# Altium PCB opo_v3.0.PcbDoc (part 1 of 2)
Units mil, origin at the board's own origin, x right, y up, seen from the top; angles counter-clockwise.
Board outline 2047.24 x 1889.76 mil, 2 copper layers (Top Layer, Bottom Layer), stack 61.4 mil thick; 103 components, 79 nets, 432 pads, 140 vias.
Unrouted connection lines stored in the file: 108.
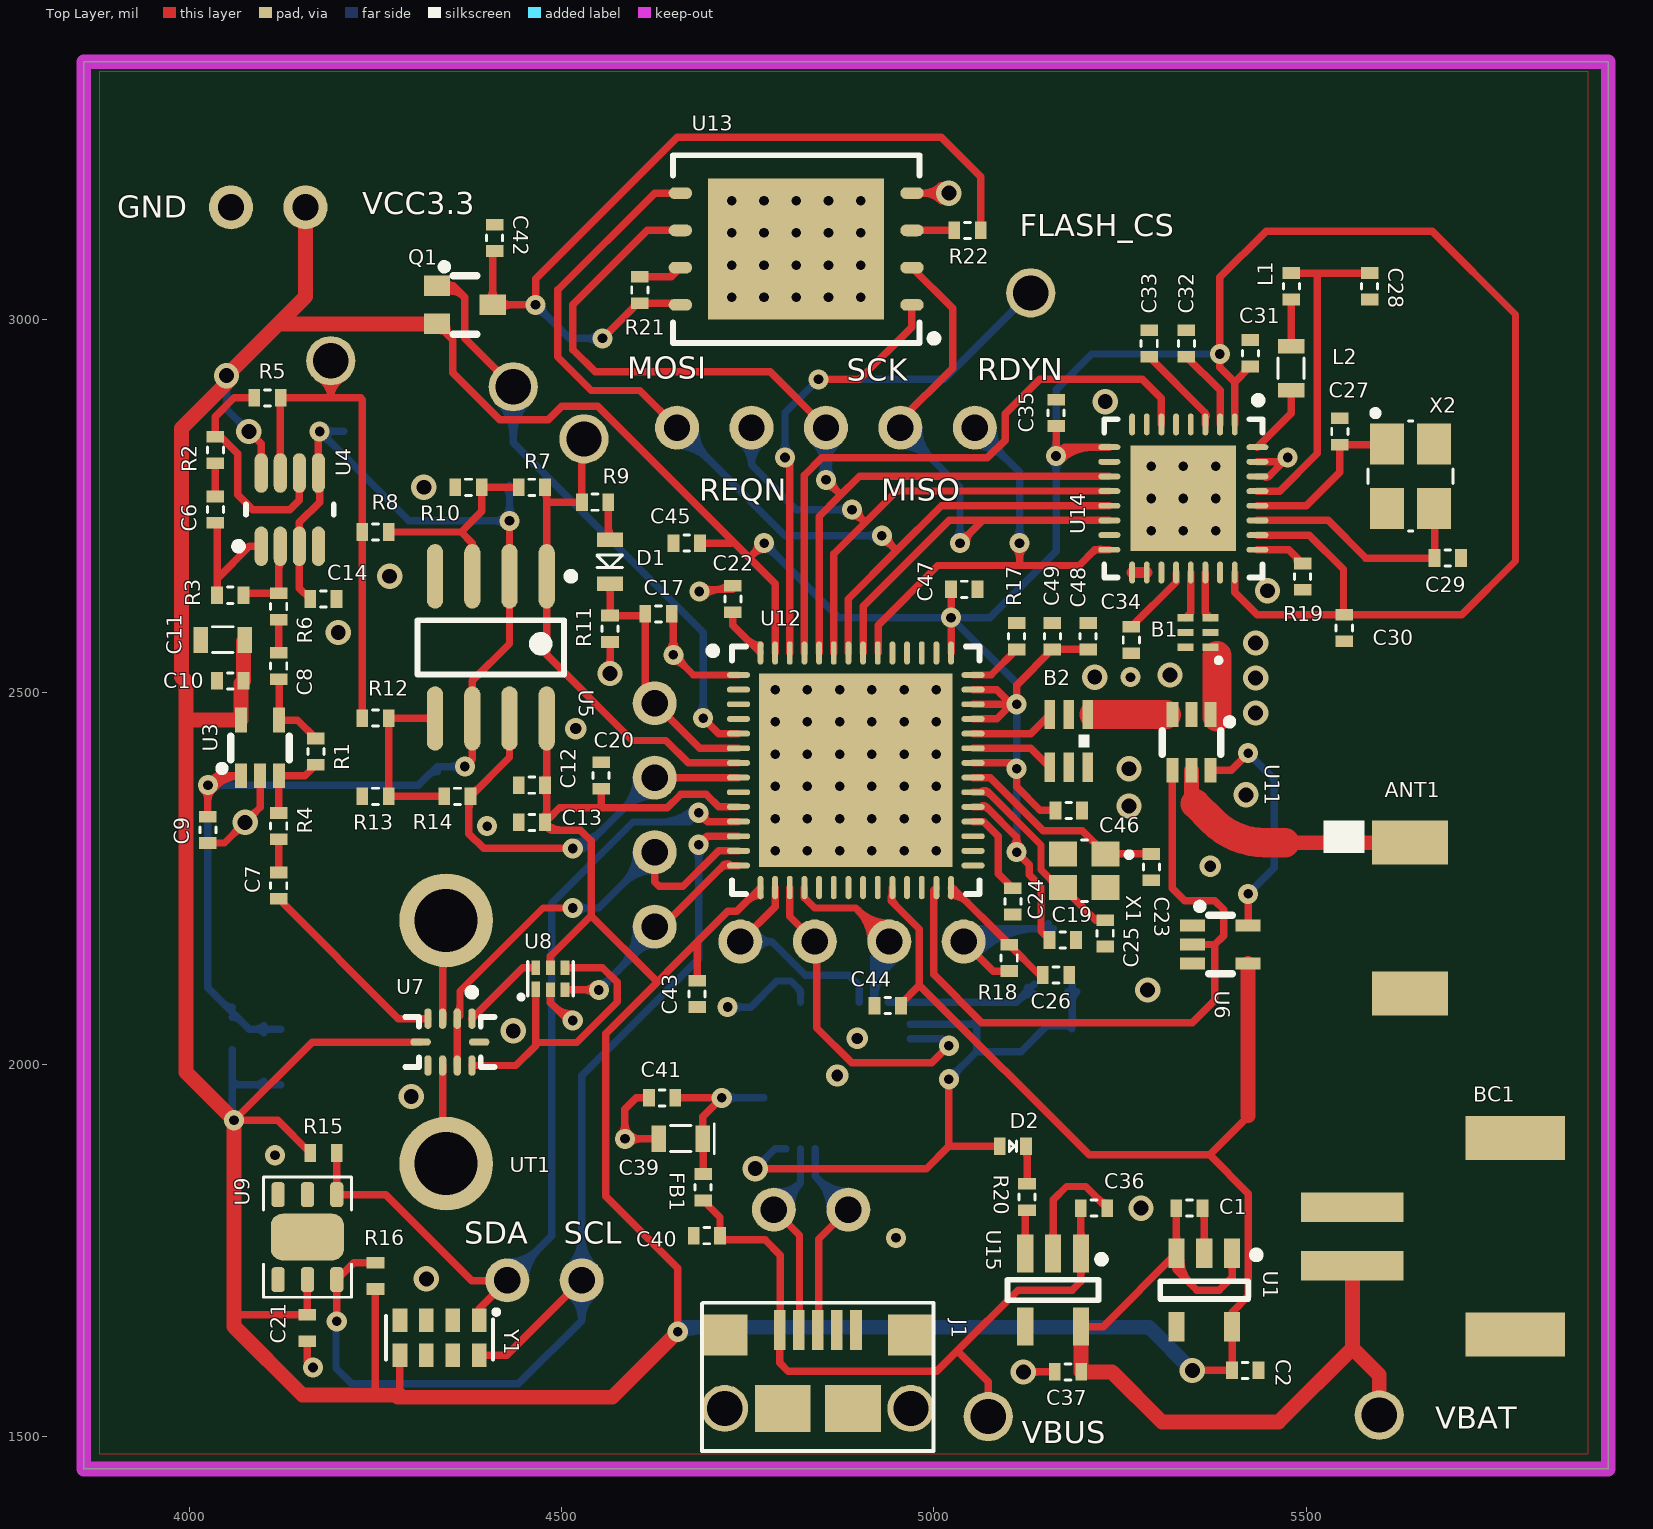
[diagram p0: Top Layer view]
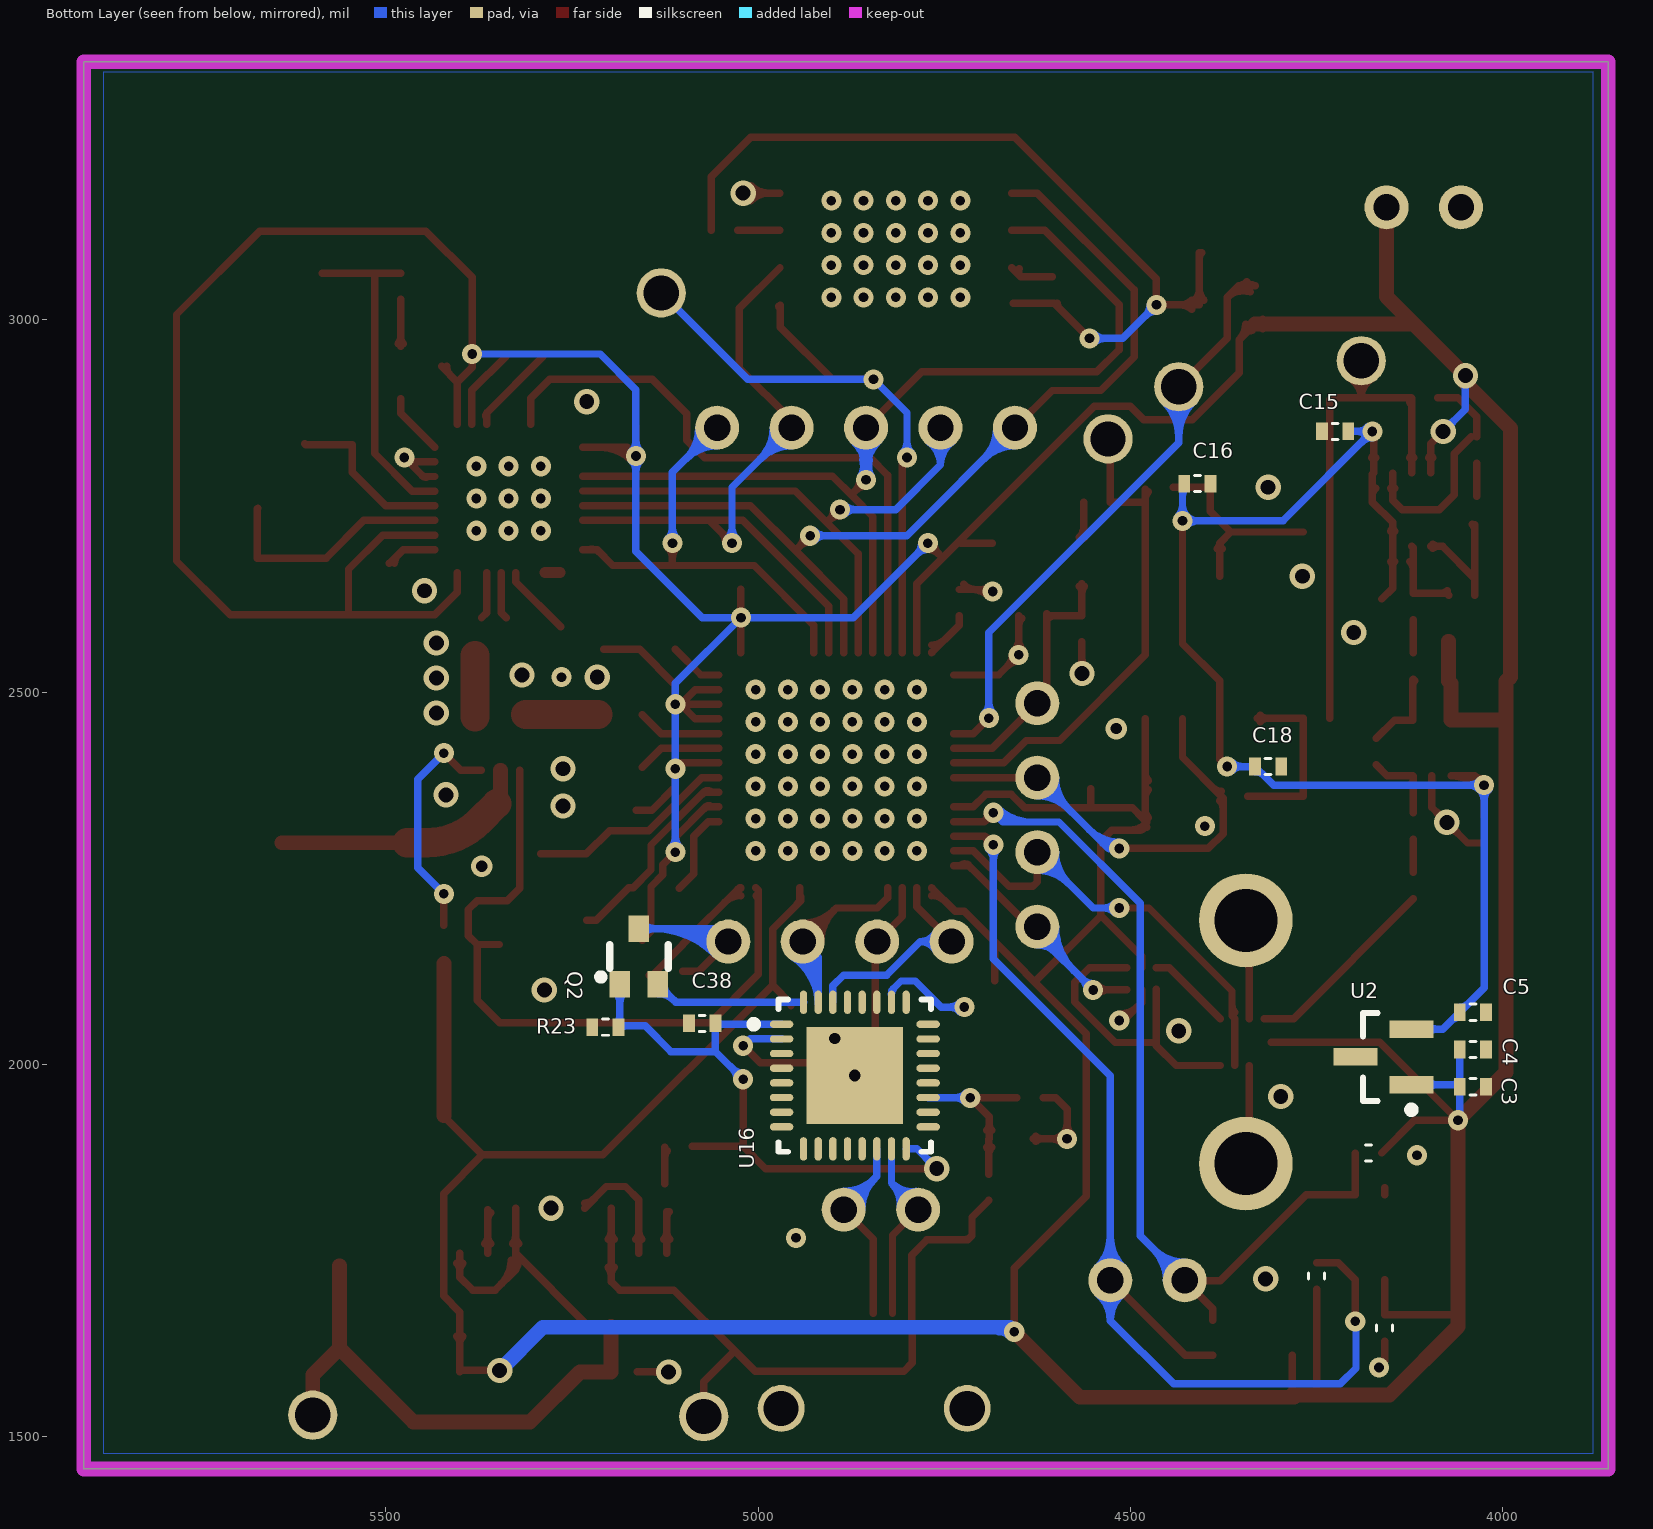
[diagram p1: Bottom Layer view, seen from below]

## Layer stack, top to bottom
Top Solder: solder mask 0.4, Solder Resist, Dk 3.5
Top Layer: signal copper 1.7
Dielectric 1: dielectric 58, FR-4, Dk 4.5
Bottom Layer: signal copper 1.7
Bottom Solder: solder mask 0.4, Solder Resist, Dk 3.5

## Board outline
3858.27,1456.69 3858.27,3346.46 5905.51,3346.46 5905.51,1456.69

## Design rules (kind name [scope] priority, off if disabled: settings)
Clearance "Clearance~Sunstone Circuits" [All] p1: gap=6 // Sunstone Circuits Minimum Clearance Rule (Double Sided)
HoleSize [All] p1: absolutevalues=TRUE maxlimit=100 minlimit=1.3 maxpercent=80.000 minpercent=20.000
HoleSize "HoleSize~Sunstone Circuits" [All] p2 off: absolutevalues=TRUE maxlimit=251 minlimit=16 maxpercent=80.000 minpercent=20.000 // SSC Hole Size Rule For Single Sided & Double Sided Designs.
HoleSize Testpoint [All] p3: absolutevalues=TRUE maxlimit=100 minlimit=1 maxpercent=80.000 minpercent=20.000
HoleSize TestPointUsage [All] p4: absolutevalues=TRUE maxlimit=100 minlimit=1 maxpercent=80.000 minpercent=20.000
MinimumAnnularRing "MinimumAnnularRing~Sunstone Circuits" [All] p1: minimumring=7 // Sunstone Circuits Minimum Annular Ring (Double Sided)
PlaneClearance "PlaneClearance~Sunstone Circuits" [All] p1: clearance=12 // Sunstone Circuits Power Plane Clearance Rule (Double Sided)
PlaneConnect "PlaneConnect~Sunstone Circuits" [All] p1: planeconnectstyle=Relief reliefexpansion=10 reliefentries=4 reliefconductorwidth=8 reliefairgap=10 // Sunstone Circuits Power Plane Connect Rule (Double Sided)
PolygonConnect "PolygonConnect~Sunstone Circuits" [All] p1: connectstyle=Direct reliefconductorwidth=8 reliefentries=4 polygonreliefangle="90 Angle" airgapwidth=10 // Sunstone Circuits Polygon Connect Style (Double Sided)
RoutingVias "RoutingVias~Sunstone Circuits" [All] p1: holewidth=16 width=30 viastyle="Through Hole" minholewidth=16 minwidth=30 maxholewidth=20 maxwidth=40 // Sunstone Circuits Routing Vias Rule (Double Sided)
ShortCircuit "ShortCircuit~Sunstone Circuits" [All] p1: allowed=FALSE // Sunstone Circuits Short Circuit Rule~Do Not Allow (Double Sided)
SolderMaskExpansion "SolderMaskExpansion~Sunstone Circuits" [All] p1: expansion=3 // Sunstone Circuits Solder Mask Expansion Rule (Double Sided)
UnpouredPolygon [All] p1: allowunpoured=FALSE
ViasUnderSMD "ViasUnderSMD~Sunstone Circuits" [All] p1: allowed=FALSE // Sunstone Circuits Vias Under SMD~Do Not Allow (Double Sided)
Width "Width~Sunstone Circuits" [All] p1: maxlimit=100 minlimit=6 preferedwidth=10 // Sunstone Circuits Minimum Width Rule (Double Sided)
25 further rules are at their usual default settings.

## Classes and differential pairs
component class accero_humid_rtc: C21 R15 R16 U9 Y1
component class bluetooth: B1 C27 C28 C29 C30 C31 C32 C33 C34 C35 L1 L2 R19 U14 X2
component class mcu: ANT1 B2 C19 C20 C22 C23 C24 C25 C26 C42 C43 C44 C45 C46 C47 C48 C49 Q1 Q2 R17 R18 R21 R22 R23 U6 U11 U12 U13 X1
component class power: BC1 C1 C2 C3 C4 C5 U1 U2
component class programming: C36 C37 C38 C39 C40 C41 D2 FB1 J1 R20 U15 U16
component class ultrasonic_rx: C6 C7 C8 C9 C10 C11 C12 C13 C14 C15 C16 C17 C18 D1 R1 R2 R3 R4 R5 R6 R7 R8 R9 R10 R11 R12 R13 R14 U3 U4 U5
component class ultrasonic_tx: U7 U8 UT1

## Components (designator, comment, footprint, x,y, rotation, side; value= is the part's Value field where it differs from the comment)
ANT1 "Ground Antenna" "Chip Antenna" 5644.37,2216 r270 top
B1 "2450BM14A0002" 2450BM14A0002 5354.69,2580 r270 top
B2 "BALUN" "Chip Balun" 5181,2434.37 r0 top
BC1 "PRT-08612" "JST PH 2PIN" 5562,1769 r90 top
C1 "Ceramic capacitor" 0402#1 5343,1807 r0 top
C2 "Ceramic capacitor" 0402#1 5418,1589 r0 top
C3 "Ceramic capacitor" 0402#1 4040,1970 r180 bottom
C4 "Ceramic capacitor" 0402#1 4040,2020 r180 bottom
C5 "Ceramic capacitor" 0402#1 4040,2070 r180 bottom
C6 "Ceramic capacitor" 0402#1 4035,2745 r90 top
C7 "Ceramic capacitor" 0402#1 4120,2240 r90 top
C8 "Ceramic capacitor" 0402#1 4120,2535 r90 top
C9 "Ceramic capacitor" 0402#1 4025,2315 r270 top
C10 "Ceramic capacitor" 0402#1 4055,2515 r180 top
C11 "Ceramic capacitor" 0603 4045,2570 r180 top
C12 "Ceramic capacitor" 0402#1 4460,2375 r180 top
C13 "Ceramic capacitor" 0402#1 4460,2325 r180 top
C14 "Ceramic capacitor" 0402#1 4180,2625 r0 top
C15 "Ceramic capacitor" 0402#1 4225,2850 r0 bottom
C16 "Ceramic capacitor" 0402#1 4410,2780 r180 bottom
C17 "Ceramic capacitor" 0402#1 4630,2605 r0 top
C18 "Ceramic capacitor" 0402#1 4315,2400 r180 bottom
C19 "Ceramic capacitor" 0402#1 5173,2167 r0 top
C20 "Ceramic capacitor" 0402#1 4553,2388 r90 top
C21 "Ceramic capacitor" 0402#2 4158.63,1646 r90 top
C22 "Ceramic capacitor" 0402#1 4730,2625 r90 top
C23 "13pf 0402 Cap" 0402#1 5292,2264.92 r270 top
C24 "Ceramic capacitor" 0402#1 5106,2219 r270 top
C25 "13pf 0402 Cap" 0402#1 5230,2176 r90 top
C26 "Ceramic capacitor" 0402#1 5164,2120 r0 top
C27 "15pF 0402 ceramic cap" 0402#1 5545,2850 r90 top
C28 "Ceramic capacitor" 0402#1 5585,3045 r270 top
C29 "15pF 0402 ceramic cap" 0402#1 5690,2680 r180 top
C30 "Ceramic capacitor" 0402#1 5551,2586 r270 top
C31 "4.7uF" 0402#1 5425,2955 r90 top
C32 "Ceramic capacitor" 0402#1 5339,2968 r90 top
C33 "33nF" 0402#1 5289,2968 r90 top
C34 "2.2nF" 0402#1 5265,2570 r270 top
C35 "Ceramic capacitor" 0402#1 5164,2875 r90 top
C36 "Ceramic capacitor" 0402#1 5215,1807 r0 top
C37 "Ceramic capacitor" 0402#1 5180,1587 r180 top
C38 "Ceramic capacitor" 0402#1 5075,2055 r0 bottom
C39 "Tantalum capacitor" "0603 - Polar Marking" 4660,1900 r180 top
C40 "Ceramic capacitor" 0402#1 4695,1770 r180 top
C41 "Ceramic capacitor" 0402#1 4635,1955 r180 top
C42 "Ceramic capacitor" 0402#1 4410,3110 r270 top
C43 "Ceramic capacitor" 0402#1 4682,2094.72 r270 top
C44 "Ceramic capacitor" 0402#1 4938,2079 r180 top
C45 "Ceramic capacitor" 0402#1 4668,2700 r180 top
C46 "Ceramic capacitor" 0402#1 5181,2341 r0 top
C47 "Ceramic capacitor" 0402#1 5040.67,2638 r0 top
C48 "Ceramic capacitor" 0402#1 5207,2575 r90 top
C49 "220pF 0402 ceramic cap" 0402#1 5159,2575 r90 top
D1 "Schottky diode" "0603 - DIODE" 4565,2675 r270 top
D2 "LED, Green" "0402 - DIODE" 5106,1890 r0 top
FB1 "Ferrite Bead" 0402#1 4690,1835 r270 top
J1 "micro USB-B" "Micro USB-B" 4844,1538 r0 top
L1 "15nH chip inductor" 0402#1 5480,3045 r270 top
L2 "10uH chip inductor" 0603 5480,2935 r270 top
Q1 "DMG1013UW" SC70-3 4370,3020 r270 top
Q2 "Si1300BDL" SC70-3 5160,2145 r180 bottom
R1 "Chip resistor" 0402#1 4170,2420 r90 top
R2 "Chip resistor" 0402#1 4035,2825 r90 top
R3 "Chip resistor" 0402#1 4055,2630 r0 top
R4 "Chip resistor" 0402#1 4120,2320 r90 top
R5 "Chip resistor" 0402#1 4105,2895 r180 top
R6 "Chip resistor" 0402#1 4120,2615 r90 top
R7 "Chip resistor" 0402#1 4460,2775 r0 top
R8 "Chip resistor" 0402#1 4250,2715 r0 top
R9 "Chip resistor" 0402#1 4545,2755 r0 top
R10 "Chip resistor" 0402#1 4375,2775 r180 top
R11 "Chip resistor" 0402#1 4565,2585 r270 top
R12 "Chip resistor" 0402#1 4250,2465 r0 top
R13 "Chip resistor" 0402#1 4250,2360 r180 top
R14 "Chip resistor" 0402#1 4360,2360 r0 top
R15 "Chip resistor" 0402#2 4180.28,1881 r180 top
R16 "Chip resistor" 0402#2 4250,1716 r270 top
R17 "56k 0402 Res" 0402#1 5111,2575 r90 top
R18 "2.2 Ohm 0402 Res" 0402#1 5101,2143 r270 top
R19 "22k 0402 resistor" 0402#1 5495,2655 r270 top
R20 "Chip resistor" 0402#1 5125,1822 r270 top
R21 "Chip resistor" 0402#1 4605,3040 r90 top
R22 "Chip resistor" 0402#1 5045,3120 r180 top
R23 "Chip resistor" 0402#1 5205,2050 r0 bottom
U1 "ADP162" TSOT23-5 5363,1697 r270 top
U2 "ISL60002" SOT23-3N 4160,2010 r0 bottom
U3 "MIC861" SC70-5 4095,2425 r0 top
U4 "MIC863" TSOP65P280X145-8N 4135,2745 r90 top
U5 "TS882" SO8 4405,2560 r270 top
U6 "NC7S14P5X" SC70-5 5384.6,2161 r270 top
U7 "NX3L4684" QFN50P155X200X13-10N 4350,2030 r270 top
U8 "NLX2G14" ULLGA6 4485,2115 r0 top
U9 "Si7021" DFN6-Si7021 4158.63,1768 r270 top
U11 "MASWSS0115" SC70-6 5345.83,2432.4 r180 top
U12 "cc2538" QFN50P800X800X100_HS-57N 4895,2395 r0 top
U13 "SST25VF064C" WSON 4815,3095 r180 top
U14 "nrf8001" QFN50P500X500X90_HS-33N 5335,2760 r270 top
U15 "MAX1555" SOT23-5 5160,1697 r270 top
U16 "FT232RQ" QFN-32 4870,1985 r180 bottom
UT1 "400EP250" "Transducer recepticle" 4345,2030 r90 top
X1 "32 MHz Crystal" FA-128 5202,2260 r180 top
X2 "16MHz Crystal" TSX-3225 5640,2790 r270 top
Y1 "RV-4162-C7" RV4162 4336,1633 r180 top

## Footprints (in the part's own frame and the unit in brackets; to place one, negate y for a bottom-side part, rotate by r counter-clockwise, add the part's x,y. Pads: shape width x height; smd on the part's side, far side on the other; paste and mask are expansions set on the pad)
0402#1 [mm] "2-Leads, Body 1.00x0.50mm, IPC Medium Density"
  rect 0.4x0.6 smd: 1(-0.45,0) 2(0.45,0)
  silkscreen extent -0.1,-0.28 0.1,0.28, body extent -0.53,-0.28 0.53,0.27, height 0.4
0402#2 [mm] "2-Leads, Body 1.00x0.50mm, IPC Medium Density"
  rect 0.4x0.6 smd: 1(0.45,0) 2(-0.45,0)
  body extent -0.53,-0.28 0.53,0.27, height 0.4
"0402 - DIODE" [mm] "2-Leads, Body 1.00x0.50mm, IPC Medium Density"
  rect 0.4x0.6 smd: 1(-0.45,0) 2(0.45,0)
  silkscreen extent -0.13,-0.18 0.13,0.18, body extent -0.53,-0.28 0.53,0.27, height 0.4
0603 [mm] "2-Leads, Body 1.55x0.85mm, IPC Medium Density"
  rect 0.5x0.9 smd: 1(-0.75,0) 2(0.75,0)
  silkscreen extent -0.35,-0.45 0.35,0.43, body extent -0.75,-0.42 0.75,0.43, height 0.5
"0603 - DIODE" [mm] "2-Leads, Body 1.55x0.85mm, IPC Medium Density"
  rect 0.5x0.9 smd: 1(-0.75,0) 2(0.75,0)
  silkscreen extent -0.23,-0.45 0.2,0.43, body extent -0.75,-0.42 0.75,0.43, height 0.5
"0603 - Polar Marking" [mm] "2-Leads, Body 1.55x0.85mm, IPC Medium Density"
  rect 0.5x0.9 smd: 1(-0.75,0) 2(0.75,0)
  silkscreen extent -1.14,-0.51 0.35,0.51, body extent -0.75,-0.42 0.75,0.43, height 0.5
2450BM14A0002 [mm]
  rect 0.25x0.55 smd: 1(0.5,0.425) 2(0,0.425) 3(-0.5,0.425) 4(-0.5,-0.425) 5(0,-0.425) 6(0.5,-0.425)
  silkscreen extent 0.91,0.66 0.99,0.74
"Chip Antenna" [mm] "FR05-S1-N-0-102"
  rect 1.5x2.6 smd: 1(-2.075,-0.125) ""(3.075,-0.125)
  silkscreen extent -2.82,-3.07 -1.72,-1.67, body extent -3.03,-1.63 3.98,1.38, height 2
"Chip Balun" [mm] "Chip Balun 2.4 GHz"
  rect 0.35x1 smd: 1(0.65,0.9) 2(0,0.9) 3(-0.65,0.9) 4(-0.65,-0.9) 5(0,-0.9) 6(0.65,-0.9)
  silkscreen extent 0.33,-0.23 0.7,0.23, body extent -1,-0.63 1,0.63, height 0.7
DFN6-Si7021 [mm]
  rrect50% 0.85x0.45 smd: 1(-1.45,1) 2(-1.45,0) 3(-1.45,-1) 4(1.45,-1) 5(1.45,0) 6(1.45,1)
  rrect50% 1.6x2.5 smd: 7(0,0)
  silkscreen extent -2.05,-1.5 2.05,1.5, body extent -1.5,-1.5 1.5,1.5, height 1.21
FA-128 [mm]
  rect 0.95x0.85 smd: 1(-0.725,-0.575) 2(0.725,-0.575) 3(0.725,0.575) 4(-0.725,0.575)
  silkscreen extent -1.58,-1.05 0.1,1.05
"JST PH 2PIN" [mm]
  rect 1x3.5 smd: 1(-1,0) 2(1,0)
  rect 1.5x3.4 smd: 3(-3.35,-5.55) 4(3.35,-5.55)
"Micro USB-B" [mm]
  rect 0.4x1.35 smd mask+0.1: 1(-1.3,2.675) 2(-0.65,2.675) 3(0,2.675) 4(0.65,2.675) 5(1.3,2.675)
  rect 1.6x1.4 smd mask+0.1: 6(-3.2,2.5) 6(3.2,2.5)
  round 1.6 hole 1.2: 6(-3.175,0) 6(3.175,0)
  rect 1.9x1.6 smd mask+0.1: 6(-1.2,0) 6(1.2,0)
  silkscreen extent -3.95,-1.45 3.95,3.6
QFN50P155X200X13-10N [mm] "QFN, 10-Leads, Body 2.1x1.6mm (max), Pitch 0.50mm, IPC Medium Density"
  oval 0.7x0.25 smd: 1(-0.8,0.75) 2(-0.8,0.25) 3(-0.8,-0.25) 4(-0.8,-0.75) 6(0.8,-0.75) 7(0.8,-0.25) 8(0.8,0.25) 9(0.8,0.75)
  oval 0.25x0.7 smd: 5(0,-1) 10(0,1)
  silkscreen extent -1.82,-1.53 0.85,1.53, body extent -0.83,-1.05 0.82,1.05, height 0.13
QFN50P500X500X90_HS-33N [mm] "QFN, 32-Leads, Body 5.00x5.00mm, Pitch 0.50mm, Thermal Pad 3.60x3.60mm, IPC Medium Density"
  oval 0.75x0.2 smd: 1(-2.525,1.75) 2(-2.525,1.25) 3(-2.525,0.75) 4(-2.525,0.25) 5(-2.525,-0.25) 6(-2.525,-0.75) 7(-2.525,-1.25) 8(-2.525,-1.75) 17(2.525,-1.75) 18(2.525,-1.25) 19(2.525,-0.75) 20(2.525,-0.25) 21(2.525,0.25) 22(2.525,0.75) 23(2.525,1.25) 24(2.525,1.75)
  oval 0.2x0.75 smd: 9(-1.75,-2.525) 10(-1.25,-2.525) 11(-0.75,-2.525) 12(-0.25,-2.525) 13(0.25,-2.525) 14(0.75,-2.525) 15(1.25,-2.525) 16(1.75,-2.525) 25(1.75,2.525) 26(1.25,2.525) 27(0.75,2.525) 28(0.25,2.525) 29(-0.25,2.525) 30(-0.75,2.525) 31(-1.25,2.525) 32(-1.75,2.525)
  rect 3.6x3.6 smd: 33(0,0)
  silkscreen extent -3.47,-2.7 2.7,2.7, body extent -2.55,-2.55 2.55,2.55, height 0.9
QFN50P800X800X100_HS-57N [mm] "QFN, 56-Leads, Body 8.00x8.00mm, Pitch 0.50mm, Thermal Pad 6.60x6.60mm, IPC Medium Density"
  oval 0.8x0.2 smd: 1(-4,3.25) 2(-4,2.75) 3(-4,2.25) 4(-4,1.75) 5(-4,1.25) 6(-4,0.75) 7(-4,0.25) 8(-4,-0.25) 9(-4,-0.75) 10(-4,-1.25) 11(-4,-1.75) 12(-4,-2.25) 13(-4,-2.75) 14(-4,-3.25) 29(4,-3.25) 30(4,-2.75) 31(4,-2.25) 32(4,-1.75) 33(4,-1.25) 34(4,-0.75) 35(4,-0.25) 36(4,0.25) 37(4,0.75) 38(4,1.25) 39(4,1.75) 40(4,2.25) 41(4,2.75) 42(4,3.25)
  oval 0.2x0.8 smd: 15(-3.25,-4) 16(-2.75,-4) 17(-2.25,-4) 18(-1.75,-4) 19(-1.25,-4) 20(-0.75,-4) 21(-0.25,-4) 22(0.25,-4) 23(0.75,-4) 24(1.25,-4) 25(1.75,-4) 26(2.25,-4) 27(2.75,-4) 28(3.25,-4) 43(3.25,4) 44(2.75,4) 45(2.25,4) 46(1.75,4) 47(1.25,4) 48(0.75,4) 49(0.25,4) 50(-0.25,4) 51(-0.75,4) 52(-1.25,4) 53(-1.75,4) 54(-2.25,4) 55(-2.75,4) 56(-3.25,4)
  rect 6.6x6.6 smd: 57(0,0)
  silkscreen extent -5,-4.23 4.23,4.23, body extent -4.08,-4.08 4.08,4.08, height 1
QFN-32 [mm] "32-Pin QFN 0.5 mm Pitch"
  oval 0.8x0.25 smd: 1(-2.5,1.75) 2(-2.5,1.25) 3(-2.5,0.75) 4(-2.5,0.25) 5(-2.5,-0.25) 6(-2.5,-0.75) 7(-2.5,-1.25) 8(-2.5,-1.75) 17(2.5,-1.75) 18(2.5,-1.25) 19(2.5,-0.75) 20(2.5,-0.25) 21(2.5,0.25) 22(2.5,0.75) 23(2.5,1.25) 24(2.5,1.75)
  oval 0.25x0.8 smd: 9(-1.75,-2.5) 10(-1.25,-2.5) 11(-0.75,-2.5) 12(-0.25,-2.5) 13(0.25,-2.5) 14(0.75,-2.5) 15(1.25,-2.5) 16(1.75,-2.5) 25(1.75,2.5) 26(1.25,2.5) 27(0.75,2.5) 28(0.25,2.5) 29(-0.25,2.5) 30(-0.75,2.5) 31(-1.25,2.5) 32(-1.75,2.5)
  rect 3.3x3.3 smd: 33(0,0)
  silkscreen extent -3.58,-2.6 2.6,2.6, body extent -2.58,-2.58 2.58,2.58, height 0.8
RV4162 [mm] "RTC"
  rect 0.5x0.8 smd: 1(-1.35,-0.6) 2(-0.45,-0.6) 3(0.45,-0.6) 4(1.35,-0.6) 5(1.35,0.6) 6(0.45,0.6) 7(-0.45,0.6) 8(-1.35,0.6)
  silkscreen extent -1.97,-0.91 1.83,0.75, body extent -1.6,-0.75 1.6,0.75, height 0.8
SC70-3 [mm]
  rect 0.7x0.9 smd: 1(-0.65,-0.95) 2(0.65,-0.95) 3(0,0.95)
  silkscreen extent -1.4,-0.8 1,0.4, body extent -0.9,-0.6 0.9,0.6, height 0.8
SC70-5 [mm]
  rect 0.4x0.85 smd: 1(-0.65,-0.95) 2(0,-0.95) 3(0.65,-0.95) 4(0.65,0.95) 5(-0.65,0.95)
  silkscreen extent -1.4,-0.8 1,0.4, body extent -0.9,-0.6 0.9,0.6, height 0.8
SC70-6 [mm]
  rect 0.4x0.85 smd: 1(-0.65,-0.95) 2(0,-0.95) 3(0.65,-0.95) 4(0.65,0.95) 5(0,0.95) 6(-0.65,0.95)
  silkscreen extent -1.4,-0.8 1,0.4, body extent -0.9,-0.6 0.9,0.6, height 0.8
SO8 [mm] "SOP, 8-Leads, Body 4.90x3.90mm, Pitch 1.27mm, IPC Medium Density"
  oval 2.2x0.55 smd: 1(-2.425,1.905) 2(-2.425,0.635) 3(-2.425,-0.635) 4(-2.425,-1.905) 5(2.425,-1.905) 6(2.425,-0.635) 7(2.425,0.635) 8(2.425,1.905)
  silkscreen extent -2.55,-2.5 0.93,2.86, body extent -2,-2.5 2,2.5, height 1.75
SOT23-3N [mm] "SOT23, 3-Leads, Body 2.9x1.3mm, Pitch 0.95mm, Lead Span 2.5mm, IPC Medium Density"
  rect 1.5x0.6 smd: 1(-0.95,0.95) 2(-0.95,-0.95) 3(0.95,0)
  silkscreen extent -1.07,-1.5 0.7,1.92, body extent -0.7,-1.5 0.7,1.5, height 1.1
SOT23-5 [mm] "SOT23, 5-Leads, Body 2.9x1.6mm, Pitch 0.95mm, Lead Span 2.8mm, IPC High Density"
  rect 1.3x0.55 smd: 1(-1.25,0.95) 2(-1.25,0) 3(-1.25,-0.95) 4(1.25,-0.95) 5(1.25,0.95)
  silkscreen extent -1.17,-1.55 0.35,1.78, body extent -0.67,-1.5 0.65,1.5, height 1.45
"Transducer recepticle" [mm] "Transducer with Pin Recepticle"
  round 3.2 hole 2.15: 1(-4.15,0) 2(4.15,0)
  body extent -6.45,-6.49 6.5,6.49, height 14
TSOP65P280X145-8N [mm] "TSOP, 8-Leads, Body 2.90x1.60mm, Pitch 0.65mm, IPC Medium Density"
  oval 1.35x0.45 smd: 1(-1.25,0.975) 2(-1.25,0.325) 3(-1.25,-0.325) 4(-1.25,-0.975) 5(1.25,-0.975) 6(1.25,-0.325) 7(1.25,0.325) 8(1.25,0.975)
  silkscreen extent -1.37,-1.5 0.18,1.87, body extent -0.85,-1.5 0.85,1.5, height 1.45
TSOT23-5 [mm] "SOT23, 6-Leads, Body 3.0x2.9mm (max), Pitch 0.95mm, IPC Medium Density"
  rect 1x0.55 smd: 1(-1.25,0.95) 2(-1.25,0) 3(-1.25,-0.95) 4(1.25,-0.95) 5(1.25,0.95)
  silkscreen extent -1.32,-1.5 0.3,1.9, body extent -0.87,-1.5 0.87,1.5, height 1
TSX-3225 [mm]
  rect 1.4x1.15 smd: 1(-1.1,-0.8) 2(1.1,-0.8) 3(1.1,0.8) 4(-1.1,0.8)
  silkscreen extent -2.23,-1.45 1.88,1.45
ULLGA6 [mm] "ULLGA6 1.45x1.0, 0.5P  CASE 613AF"
  rect 0.3x0.53 smd: 1(-0.5,-0.355)
  rect 0.3x0.49 smd: 2(0,-0.375) 3(0.5,-0.375) 4(0.5,0.375) 5(0,0.375) 6(-0.5,0.375)
  silkscreen extent -1.02,-0.65 0.77,0.58, body extent -0.72,-0.5 0.72,0.5, height 0.4
WSON [mm] "QFN, 8-Leads, Body 8.00x6.00mm, Pitch 1.27mm, Thermal Pad 6.00x4.80mm, IPC Medium Density"
  oval 0.8x0.4 smd: 1(-3.95,1.905) 2(-3.95,0.635) 3(-3.95,-0.635) 4(-3.95,-1.905) 5(3.95,-1.905) 6(3.95,-0.635) 7(3.95,0.635) 8(3.95,1.905)
  rect 6x4.8 smd: 9(0,0)
  silkscreen extent -4.83,-3.2 4.2,3.2, body extent -4.05,-3.05 4.05,3.05, height 0.8

## Part data
ANT1: "2.4GHz Surface Mount Device (SMD) On Ground Antenna, 50 Ohms"
B1: library part nrf8001_balun, "nrf8001 chip balun"
B2: library part cc2538_Balun, "Johanson CC253X Balun"
BC1: library part JST-PH-2mm-2Pin, "2-pin JST-PH 2mm Battery Connector"
C1 C2 C7 C22 C24 C28 C36 C37: library part C_1u_0402_ceramic, "Ceramic capacitor, 1 uF, 0402 package"
C3: library part C_10u_0402_ceramic, "Ceramic capacitor, 10 uF, 0402 package"
C4 C5 C9 C10 C12 C13 C14 C15 C16 C18 C19 C20 C21 C32 C35 C38 C40 C41 C42 C43 C44 C45 C46 C47 C48: library part C_0.1u_0402_ceramic, "Ceramic capacitor, 0.1u, 0402 package"
C6 C8: library part C_47p_0402_ceramic, "Ceramic capacitor, 47 pF, 0402 package"
C11: library part C_10u_0603_ceramic, "Ceramic capacitor, 10 uF, 0603 package"
C17 C26 C30: library part C_1000p_0402_ceramic, "Ceramic capacitor, 1000 pF, 0402 package"
C23 C25: library part C_13p_0402, "13pf, 50V, 2%, c0G, NP0, 0402, ceramic"
C27 C29: library part C_15p_0402_ceramic, "15pF, 2%, NP0, 0402"
C31: library part C_4.7u_0402_ceramic, "4.7 uF 10% 0402 6.3V X5R ceramic cap"
C33: library part C_0.033uF_0402_ceramic, "33nF 10% 0402 16V X7R ceramic cap"
C34: library part C_2.2n_0402_ceramic, "2.2nF 10% 50V X7R ceramic cap"
C39: library part C_4.7u_0603_tantalum, "Tantalum capacitor, 4.7 uF, 0603 package"
C49: library part C_220pf_0402_ceramic, "220pF 5% 50 V C0G NP0 0402 ceramic cap"
D1: library part D_SCHOTTKY_30V_0.1A_0603, "Schottky diode 30 V 0.1 A 0603"
D2: library part D_LED_GREEN_0402, "LED, Green,  0402"
FB1: library part FB_150mA_0402, "Ferrite Bead, 150 mA, 0402 package"
J1: library part "Micro USB", "CONN USB MICRO B RECPT SMT R/A"
L1: library part L_15nH_0402, "15 nH, 5%, 460mOhm, 2.3Ghz, 0402 chip inductor"
L2: library part L_10u_0603, "10uH, 10%, 32MHz, 468 mOhm, 0603, chip inductor"
Q1: "P-CHANNEL ENHANCEMENT MODE MOSFET"
Q2: "MOSFET N-CH D-S 20V SC-70-3"
R1 R3 R5: library part R_1M_0402, "Chip resistor, 1M, 0402 package"
R2 R4 R6 R21 R22 R23: library part R_100K_0402, "Chip resistor, 100K, 0402 package"
R7 R14: library part R_1.24M_0402, "Chip resistor, 1.24M, 0402 package"
R8 R12: library part R_37.4K_0402, "Chip resistor, 37.4K, 0402 package"
R9: library part R_27K_0402, "Chip resistor, 27K, 0402 package"
R10 R13: library part R_422K_0402, "Chip resistor, 422K, 0402 package"
R11: library part R_270K_0402, "Chip resistor, 270K, 0402 package"
R15 R16: library part R_10K_0402, "Chip resistor, 10K, 0402 package"
R17: library part R_56K_0402, "56 kOhm, 1%, .0603 W, 0402"
R18: library part R_2.2_0402, "2.2 Ohm, 1%, .063W, 0402"
R19: library part R_22k_0402, "22k 1% .063W 0402 resistor"
R20: library part R_1K_0402, "Chip resistor, 1K, 0402 package"
U1: "IC REG LDO 3.3V 0.15A TSOT23-5"
U2: "IC VREF SERIES PREC SOT-23-3"
U3: "IC OPAMP 400KHZ 2.7V ULT LP SC70"
U4: "Dual Ultra Low Power Op Amp in SOT23-8"
U5: "Ultra Low Power Dual Comparator"
U7: "IC ANALOG SWITCH SPDT 10XQFN"
U8: "IC INVERTER DUAL SCHMTRIG ULLGA6"
U9: "Temperature and Humidity Sensor"
U11: "Rf Switch"
U12: "cc2538 MCU/802.15.4 radio"
U13: "64 Mbit SPI Serial Dual I/O Flash"
U14: "nrf8001 Bluetooth SPI module"
U15: "3 Dual-Input USB/AC Adapter 1-Cell Li+  Battery Chargers"
U16: library part IC_FT232RQ, "FT232R USB UART"
UT1: library part Tranducer, "Air Ultrasounic Ceramic Transducers"
X1: library part X_32M_FA-128, "32MHz, 10ppm, 10pF, 60 Ohm"
X2: library part TSX-3225, "3.2x2.5mm 16MHz SMD crystal"
Y1: "Real Time Clock Module with I2C Bus"

## Free pads (board coordinates)
  round 59.05 hole 35.43: 0(4056,3151) 0(4427,1710) 1(4156,3151) 1(4527,1710) 3(4740,2165) 4(4655,2855) 4(4840,2165) 5(4755,2855) 5(4940,2165) 6(4855,2855) 6(4885,1805) 7(4785,1805) 7(4955,2855) 8(5055,2855)
  round 66.14 hole 47.24: 0(4190,2945) 0(5073,1527) 0(5130,3036) 1(4530,2840) 1(5598,1529) 12(4435,2910)
  round 59.06 hole 35.43: 0(5040,2165) 2(4625,2385) 8(4625,2285) 9(4625,2185) 11(4625,2485)

## Via types
v1: diameter 27, hole 13, Top Layer to Bottom Layer, tented both sides, 110 vias
v2: diameter 34, hole 20, Top Layer to Bottom Layer, tented both sides, 26 vias
v3: diameter 29, hole 15, Top Layer to Bottom Layer, tented both sides, 3 vias
v4: diameter 30, hole 15.75, Top Layer to Bottom Layer, tented both sides, 1 vias

## Nets (pads, with @x,y where several pads share a name; then routed paths per layer and width w, separated by ;. In a path a pad name is that pad's centre, name@x,y a point inside that pad or via, vN(x,y) a via of type N, cw(c..) or ccw(c..) an arc to the next point about the centre after c; other vN are vias at no path point)
AMP1_OUT: C8.1 R1.2 U3.4 | length 121.8
  Top Layer w10: C8.1@4117.97,2515.25 cw(c4111.64,2508.92) 4120.59,2508.92 ; C8.1@4120,2517.28 4120.59,2516.69 U3.4@4120.59,2462.4 4145.31,2462.4 R1.2@4170,2437.72
AMP2_OUT: C6.1 R3.1 U4.1 | length 196.9
  Top Layer w10: R3.1@4037.28,2630 4037.28,2652.28 ; 4037.28,2716.35 cw(c4049.87,2716.35) C6.1@4040.97,2725.25 ; C6.1@4037.28,2725 4037.28,2652.28 ; U4.1@4093.89,2693.06 ccw(c4087.3,2686.47) 4087.3,2695.79 ccw(c4087.3,2705.1) U4.1@4093.89,2698.52 ; U4.1@4096.61,2695.79 4080.79,2695.79 4037.28,2652.28
AMP3_OUT: pad.0@4190,2945 R5.1 R8.1 R12.1 U4.7 | length 769.1
  Top Layer w10: U4.7@4119.48,2814.66 ccw(c4112.89,2821.24) 4122.2,2821.24 ccw(c4131.52,2821.24) U4.7@4124.93,2814.66 ; U4.7@4122.2,2794.21 R5.1@4122.2,2894.49 ; 4122.2,2882.89 cw(c4130.89,2882.89) R5.1@4124.75,2889.03 ; R5.1@4122.72,2895 4190,2895 ; pad.0@4175.38,2921.03 cw(c4159.51,2895) 4190,2895 ; pad.0@4190,2945 4190,2895 ; pad.0@4204.62,2921.03 ccw(c4220.49,2895) 4190,2895 ; 4230,2895 4190,2895 ; R12.1@4232.28,2465 R8.1@4232.28,2715 4232.28,2892.72
BLE_ACTIVE: U12.53 U14.6 | length 837.7
  Top Layer w10: U12.53@4826.1,2552.48 4826.1,2791.1 4849.47,2814.47 5071.79,2814.47 5095.53,2838.21 5095.53,2873.53 5142,2920 5280,2920 5305.47,2894.53 U14.6@5305.47,2859.41
BLE_RDYN: pad.8@5055,2855 U12.48 U14.16 | length 826.3
  Top Layer w10: U12.48@4925,2552.95 4925,2590 5005,2670 5115,2670 ; v1@5108.99,2693.99 cw(c5094.48,2679.48) 5115,2679.48 cw(c5135.52,2679.48) v1@5121.01,2693.99 ; v1(5115,2700) 5115,2670 ; 5211.79,2686.79 cw(c5224.76,2673.82) U14.16@5224.76,2692.17 ; U14.16@5235.59,2691.1 5216.1,2691.1 5195,2670 5115,2670
  Bottom Layer w10: pad.8@5055,2830.47 cw(c5055,2771.26) 5096.87,2813.13 cw(c5138.74,2855) pad.8@5079.53,2855 ; pad.8@5055,2840.47 cw(c5055,2805.4) 5079.8,2830.2 cw(c5104.6,2855) pad.8@5069.53,2855 ; pad.8@5055,2855 5115,2795 v1(5115,2700) ; v1@5108.99,2706.01 ccw(c5094.48,2720.52) 5115,2720.52 ccw(c5135.52,2720.52) v1@5121.01,2706.01
BLE_REQN: pad.5@4755,2855 U12.51 U14.12 | length 949.6
  Top Layer w10: U12.51@4865.47,2552.48 4865.47,2685.47 4907.74,2727.74 ; v1@4890,2736.5 cw(c4890,2714.84) 4905.32,2730.16 ; v1(4890,2745) 4890.47,2745 4907.74,2727.74 ; v1@4898.5,2745 ccw(c4917.88,2745) 4904.18,2731.3 ; U14.12@5235.43,2770 4950,2770 4907.74,2727.74
  Bottom Layer w10: pad.5@4739.99,2835.6 cw(c4716.31,2805) 4755,2805 ; pad.5@4746.11,2843.51 cw(c4732.08,2825.39) 4755,2825.39 cw(c4777.92,2825.39) pad.5@4763.89,2843.51 ; pad.5@4755,2855 4755,2805 ; pad.5@4770.01,2835.6 ccw(c4793.69,2805) 4755,2805 ; v1@4883.99,2738.99 ccw(c4869.48,2724.48) 4869.48,2745 ccw(c4869.48,2765.52) v1@4883.99,2751.01 ; v1(4890,2745) 4815,2745 4755,2805
CC2538_RESET_N: pad.0@5040,2165 Q2.3 R18.2 | length 496.9
  Top Layer w10: pad.0@5040,2165 5079.72,2125.28 R18.2@5101,2125.28
  Bottom Layer w10: pad.0@5036.13,2168.87 cw(c5068.8,2136.2) 5068.8,2182.4 ; pad.0@5040,2165 5057.4,2182.4 Q2.3@5160,2182.4 ; pad.0@5043.2,2161.8 cw(c5092.94,2112.06) 5092.94,2182.4 ; pad.0@5050.27,2154.73 cw(c5117.08,2087.92) 5117.08,2182.4 ; pad.0@5057.34,2147.66 cw(c5141.23,2063.77) 5141.23,2182.4 ; Q2.3@5153.79,2176.19 ccw(c5138.8,2161.21) 5138.8,2182.4 ccw(c5138.8,2203.6) Q2.3@5153.79,2188.61
COMP1_OUT: pad.1@4530,2840 R7.2 R9.1 U5.1 U12.7 | length 681.5
  Top Layer w10: R7.2@4475.68,2769.03 cw(c4465.27,2758.61) 4480,2758.61 ; R7.2@4480,2772.72 4480,2755 ; pad.1@4527.28,2837.28 R9.1@4527.28,2755 4480,2755 ; U12.7@4737.52,2404.84 4670.16,2404.84 4640,2435 4595,2435 4480,2550 U5.1@4480,2655.47 4480,2755
COMP2_OUT: pad.2 R14.2 U5.7 U12.8 | length 848
  Top Layer w10: 4375.5,2343.77 cw(c4390.01,2343.77) R14.2@4379.75,2354.03 ; R14.2@4377.72,2366.81 ccw(c4377.72,2383.25) 4389.34,2371.63 ; U5.7@4430,2464.53 4430,2412.28 R14.2@4377.72,2360 4375.5,2357.78 4375.5,2309.85 4395.35,2290 v1(4515,2290) ; pad.2@4625,2385 4625.16,2385.16 U12.8@4737.52,2385.16
  Bottom Layer w10: v1@4515,2288.5 ccw(c4515,2321.09) 4538.05,2298.05 ; v1(4515,2290) 4530,2290 ; v1@4515,2298.5 ccw(c4515,2355.23) 4555.12,2315.12 ; v1@4522.29,2285.63 cw(c4530,2281.02) 4530,2290 ; v1@4522.29,2294.37 ccw(c4530,2298.98) 4530,2290 ; pad.2@4600.47,2385 cw(c4541.26,2385) 4583.13,2343.13 cw(c4625,2301.26) pad.2@4625,2360.47 ; pad.2@4610.47,2385 cw(c4575.4,2385) 4600.2,2360.2 cw(c4625,2335.4) pad.2@4625,2370.47 ; pad.2@4625,2385 4530,2290
FLASH_CS: pad.0@5130,3036 U12.54 U13.1 | length 935.3
  Top Layer w10: U12.54@4806.42,2552.48 v1@4806.42,2808.58 ; v1(4845,2920) 4900,2920 4970,2990 U13.1@4970,3019.49 ; 4970,3011.83 cw(c4978.69,3011.83) U13.1@4972.54,3017.97
  Bottom Layer w10: v1@4793.99,2821.01 ccw(c4779.48,2835.52) 4800,2835.52 ccw(c4820.52,2835.52) v1@4806.01,2821.01 ; v1(4800,2815) 4800,2875 v1(4845,2920) 5014,2920 pad.0@5130,3036
FLASH_HOLD: R21.2 U13.7 | length 71.5
  Top Layer w10: R21.2@4605,3057.72 4647.2,3057.72 ; U13.7@4649.03,3068.73 cw(c4640.42,3064.5) 4647.21,3057.72 ; U13.7@4659.49,3070 4647.2,3057.72
FLASH_PWR: pad.12 Q1.1 U12.5 | length 1087.4
  Top Layer w10: Q1.1@4332.6,3045.59 4354.41,3045.59 ; Q1.1@4336.15,3046.75 cw(c4343.06,3025.96) 4358.55,3041.45 ; Q1.1@4339.31,3037.26 cw(c4348.77,3008.78) 4370,3030 ; Q1.1@4343.48,3040.22 cw(c4354.41,3031.79) 4354.41,3045.59 ; Q1.1@4343.48,3050.96 ccw(c4354.41,3059.39) 4354.41,3045.59 ; pad.12@4435,2910 4370,2975 4370,3030 ; v1(4690,2465) 4710.79,2444.21 U12.5@4737.52,2444.21 ; 4354.41,3045.59 4370,3030
  Bottom Layer w10: pad.12@4415.15,2890.15 cw(c4367.23,2842.23) 4435,2842.23 cw(c4502.77,2842.23) pad.12@4454.85,2890.15 ; pad.12@4422.22,2897.22 cw(c4391.37,2866.37) 4435,2866.37 cw(c4478.63,2866.37) pad.12@4447.78,2897.22 ; pad.12@4435,2910 4435,2835 4690,2580 v1(4690,2465) ; v1@4683.99,2471.01 ccw(c4669.48,2485.52) 4690,2485.52 ccw(c4710.52,2485.52) v1@4696.01,2471.01
FLASH_WP: R22.2 U13.3 | length 56.8
  Top Layer w10: U13.3@4970.51,3120 R22.2@5027.28,3120
GND: B1.2 B1.5 B2.2 B2.5 B2.6 BC1.2 C1.2 C2.2 C3.2 C4.2 C5.2 C9.2 C10.2 C11.2 C12.2 C13.2 C14.2 C15.2 C16.2 C17.2 C18.2 C19.2 C20.2 C21.2 C22.2 C23.2 C24.2 C25.1 C26.2 C27.2 C28.2 C29.1 C30.2 C31.2 C32.2 C33.2 C34.2 C35.2 C36.2 C37.2 C38.2 C39.2 C40.2 C41.2 C42.1 C43.2 C44.2 C45.2 C46.2 C47.2 C48.2 C49.2 J1.5 pad.0@4056,3151 R10.2 R11.2 R13.2 R17.2 R19.2 R23.2 U1.2 U2.3 U3.2 U4.4 U5.4 U6.3 U7.6 U7.10 U8.2 U9.2 U11.2 U12.1 U12.57 U13.4 U13.9 U14.8 U14.17 U14.18 U14.23 U14.30 U14.31 U14.33 U15.2 U16.4 U16.17 U16.20 U16.24 U16.26 U16.33 X2.2 X2.4 Y1.3 | length 1697.8
  Top Layer w10: C9.2@4025,2297.28 4047.28,2297.28 v2(4075,2325) 4095,2345 U3.2@4095,2387.6 ; v2@4066.5,2325 cw(c4045.98,2325) 4060.49,2310.49 cw(c4075,2295.98) v2@4075,2316.5 ; v2@4075,2333.5 ccw(c4075,2354.02) 4089.51,2339.51 ccw(c4104.02,2325) v2@4083.5,2325 ; C21.2@4158.63,1628.28 4158.63,1600.37 v1(4166,1593) ; U9.2@4158.63,1825.09 U9.2@4158.63,1834.37 ; U8.2@4485,2100.24 4485,2083 v1@4509,2059 ; 4490.25,2077.75 ccw(c4515,2102.51) v1@4515,2067.5 ; v1@4514.81,2059 v1(4515,2059) ; v2@4558.99,2531.01 ccw(c4544.48,2545.52) 4565,2545.52 ccw(c4585.52,2545.52) v2@4571.01,2531.01 ; v2(4565,2525) R11.2@4565,2567.28 ; v1@4578.99,1906.01 ccw(c4564.48,1920.52) 4585,1920.52 ccw(c4605.52,1920.52) 4591.01,1906.01 ccw(c4605.52,1920.52) 4605.52,1900 ccw(c4605.52,1879.48) v1@4591.01,1893.99 ; C41.2@4617.28,1955 4600,1955 4585,1940 v1(4585,1900) C39.2@4630.47,1900 ; C39.2@4627.05,1896.58 ccw(c4618.78,1888.31) 4618.78,1900 ccw(c4618.78,1911.69) C39.2@4627.05,1903.42 ; v1@4643.99,2556.01 ccw(c4629.48,2570.52) 4650,2570.52 ccw(c4670.52,2570.52) v1@4656.01,2556.01 ; C17.2@4645.68,2599.03 cw(c4635.27,2588.61) 4650,2588.61 ; v1@4650,2541.5 cw(c4650,2520.98) 4664.51,2535.49 cw(c4679.02,2550) v1@4658.5,2550 ; C17.2@4650,2602.72 v1(4650,2550) 4677.05,2522.95 U12.1@4737.52,2522.95 ; v1@4687.72,2637.72 C22.2@4730,2637.72 ; v1@4691.01,2628.99 cw(c4712.08,2607.92) 4712.08,2637.72 ; v1@4691.01,2641.01 ccw(c4698.96,2648.96) 4698.96,2637.72 ; 4707.05,2637.72 ccw(c4707.05,2661.73) C22.2@4724.03,2644.75 ; U13.4@4970.51,3170 v2(5020,3170) ; v2@5009.75,3159.75 ccw(c4984.99,3134.99) 4984.99,3170 ccw(c4984.99,3205.01) v2@5009.75,3180.25 ; v2(5120,1587) C37.2@5162.28,1587 ; v2@5126.01,1580.99 cw(c5140.52,1566.48) 5140.52,1587 cw(c5140.52,1607.52) v2@5126.01,1593.01 ; U15.2@5155.88,1765.1 ccw(c5145.93,1775.04) 5160,1775.04 ccw(c5174.07,1775.04) U15.2@5164.12,1765.1 ; U15.2@5160,1746.21 5160,1818 5178,1836 5203.72,1836 C36.2@5232.72,1807 ; 5221.09,1818.63 ccw(c5232.72,1830.25) C36.2@5232.72,1813.81 ; C1.2@5358.68,1801.03 cw(c5348.27,1790.61) 5363,1790.61 ; U1.2@5358.88,1759.19 ccw(c5348.93,1769.14) 5363,1769.14 ccw(c5377.07,1769.14) U1.2@5367.12,1759.19 ; U1.2@5363,1746.21 C1.2@5363,1804.72 ; U14.30@5434.41,2789.53 5449.53,2789.53 v1@5469.21,2809.21 ; U14.31@5434.41,2809.21 v1@5469.21,2809.21 ; U14.30@5445.24,2788.46 ccw(c5445.24,2796.26) 5450.75,2790.75 ; 5461.03,2809.21 ccw(c5461.03,2828.97) v1(5475,2815) v1@5469.21,2809.21
  Top Layer w15: U14.17@5266.1,2660.59 U14.18@5285.79,2660.59
  Bottom Layer w10: v1(4723,2077) 4754,2077 4789,2112 4808,2112 4820.79,2099.21 U16.26@4820.79,2083.43 ; v1@4729.01,2070.99 cw(c4743.52,2056.48) 4743.52,2077 cw(c4743.52,2097.52) v1@4729.01,2083.01 ; 4817.41,2102.59 cw(c4809.08,2094.25) U16.26@4820.87,2094.25
  other v1: 4949,1767 4115,1878 4786.73,2286.73 4830.04,2286.73 4873.35,2286.73 4916.65,2286.73 4959.96,2286.73 5003.27,2286.73 4400,2320 4786.73,2330.04 4830.04,2330.04 4873.35,2330.04 4916.65,2330.04 4959.96,2330.04 5003.27,2330.04 4786.73,2373.35 4830.04,2373.35 4873.35,2373.35 4916.65,2373.35 4959.96,2373.35 5003.27,2373.35 4786.73,2416.65 4830.04,2416.65 4873.35,2416.65 4916.65,2416.65 4959.96,2416.65 5003.27,2416.65 4786.73,2459.96 4830.04,2459.96 4873.35,2459.96 4916.65,2459.96 4959.96,2459.96 5003.27,2459.96 4786.73,2503.27 4830.04,2503.27 4873.35,2503.27 4916.65,2503.27 4959.96,2503.27 5003.27,2503.27 5264,2520 4685,2635 5291.69,2716.69 5335,2716.69 5378.31,2716.69 5291.69,2760 5335,2760 5378.31,2760 5291.69,2803.31 5335,2803.31 5378.31,2803.31 4728.39,3030.04 4771.69,3030.04 4815,3030.04 4858.31,3030.04 4901.61,3030.04 4728.39,3073.35 4771.69,3073.35 4815,3073.35 4858.31,3073.35 4901.61,3073.35 4728.39,3116.65 4771.69,3116.65 4815,3116.65 4858.31,3116.65 4901.61,3116.65 4728.39,3159.96 4771.69,3159.96 4815,3159.96 4858.31,3159.96 4901.61,3159.96
  other v2: 4318.28,1712 5278,1807 4298,1957 4435,2045 5287,2100 5262,2347 5419,2362 5262,2397 5432,2472 5432,2519 5216,2520 5317,2523 5432,2566 4200,2580 5448,2636 4269,2655.47 4315,2775 5230,2890
  other v3: 4897,2035 5371,2266 4519,2451
  other v4: 4870,1985